# Altium PCB MolsonPCB.PcbDoc (part 3 of 9)
Units mil, origin at the board's own origin, x right, y up, seen from the top; angles counter-clockwise.
Board outline 8000 x 6000 mil, 14 copper layers (TopLayer (1 oz), InternalPlane1 (0.5 oz), InternalPlane2 (0.5 oz), MidLayer1 (0.5 oz), InternalPlane3 (0.5 oz), MidLayer2 (0.5 oz), InternalPlane4 (0.5 oz), InternalPlane5 (0.5 oz), MidLayer3 (0.5 oz), InternalPlane6 (0.5 oz), MidLayer4 (0.5 oz), InternalPlane7 (0.5 oz), InternalPlane8 (0.5 oz), BottomLayer (1 oz)), stack 86.2 mil thick; 657 components, 643 nets, 3094 pads, 1958 vias.
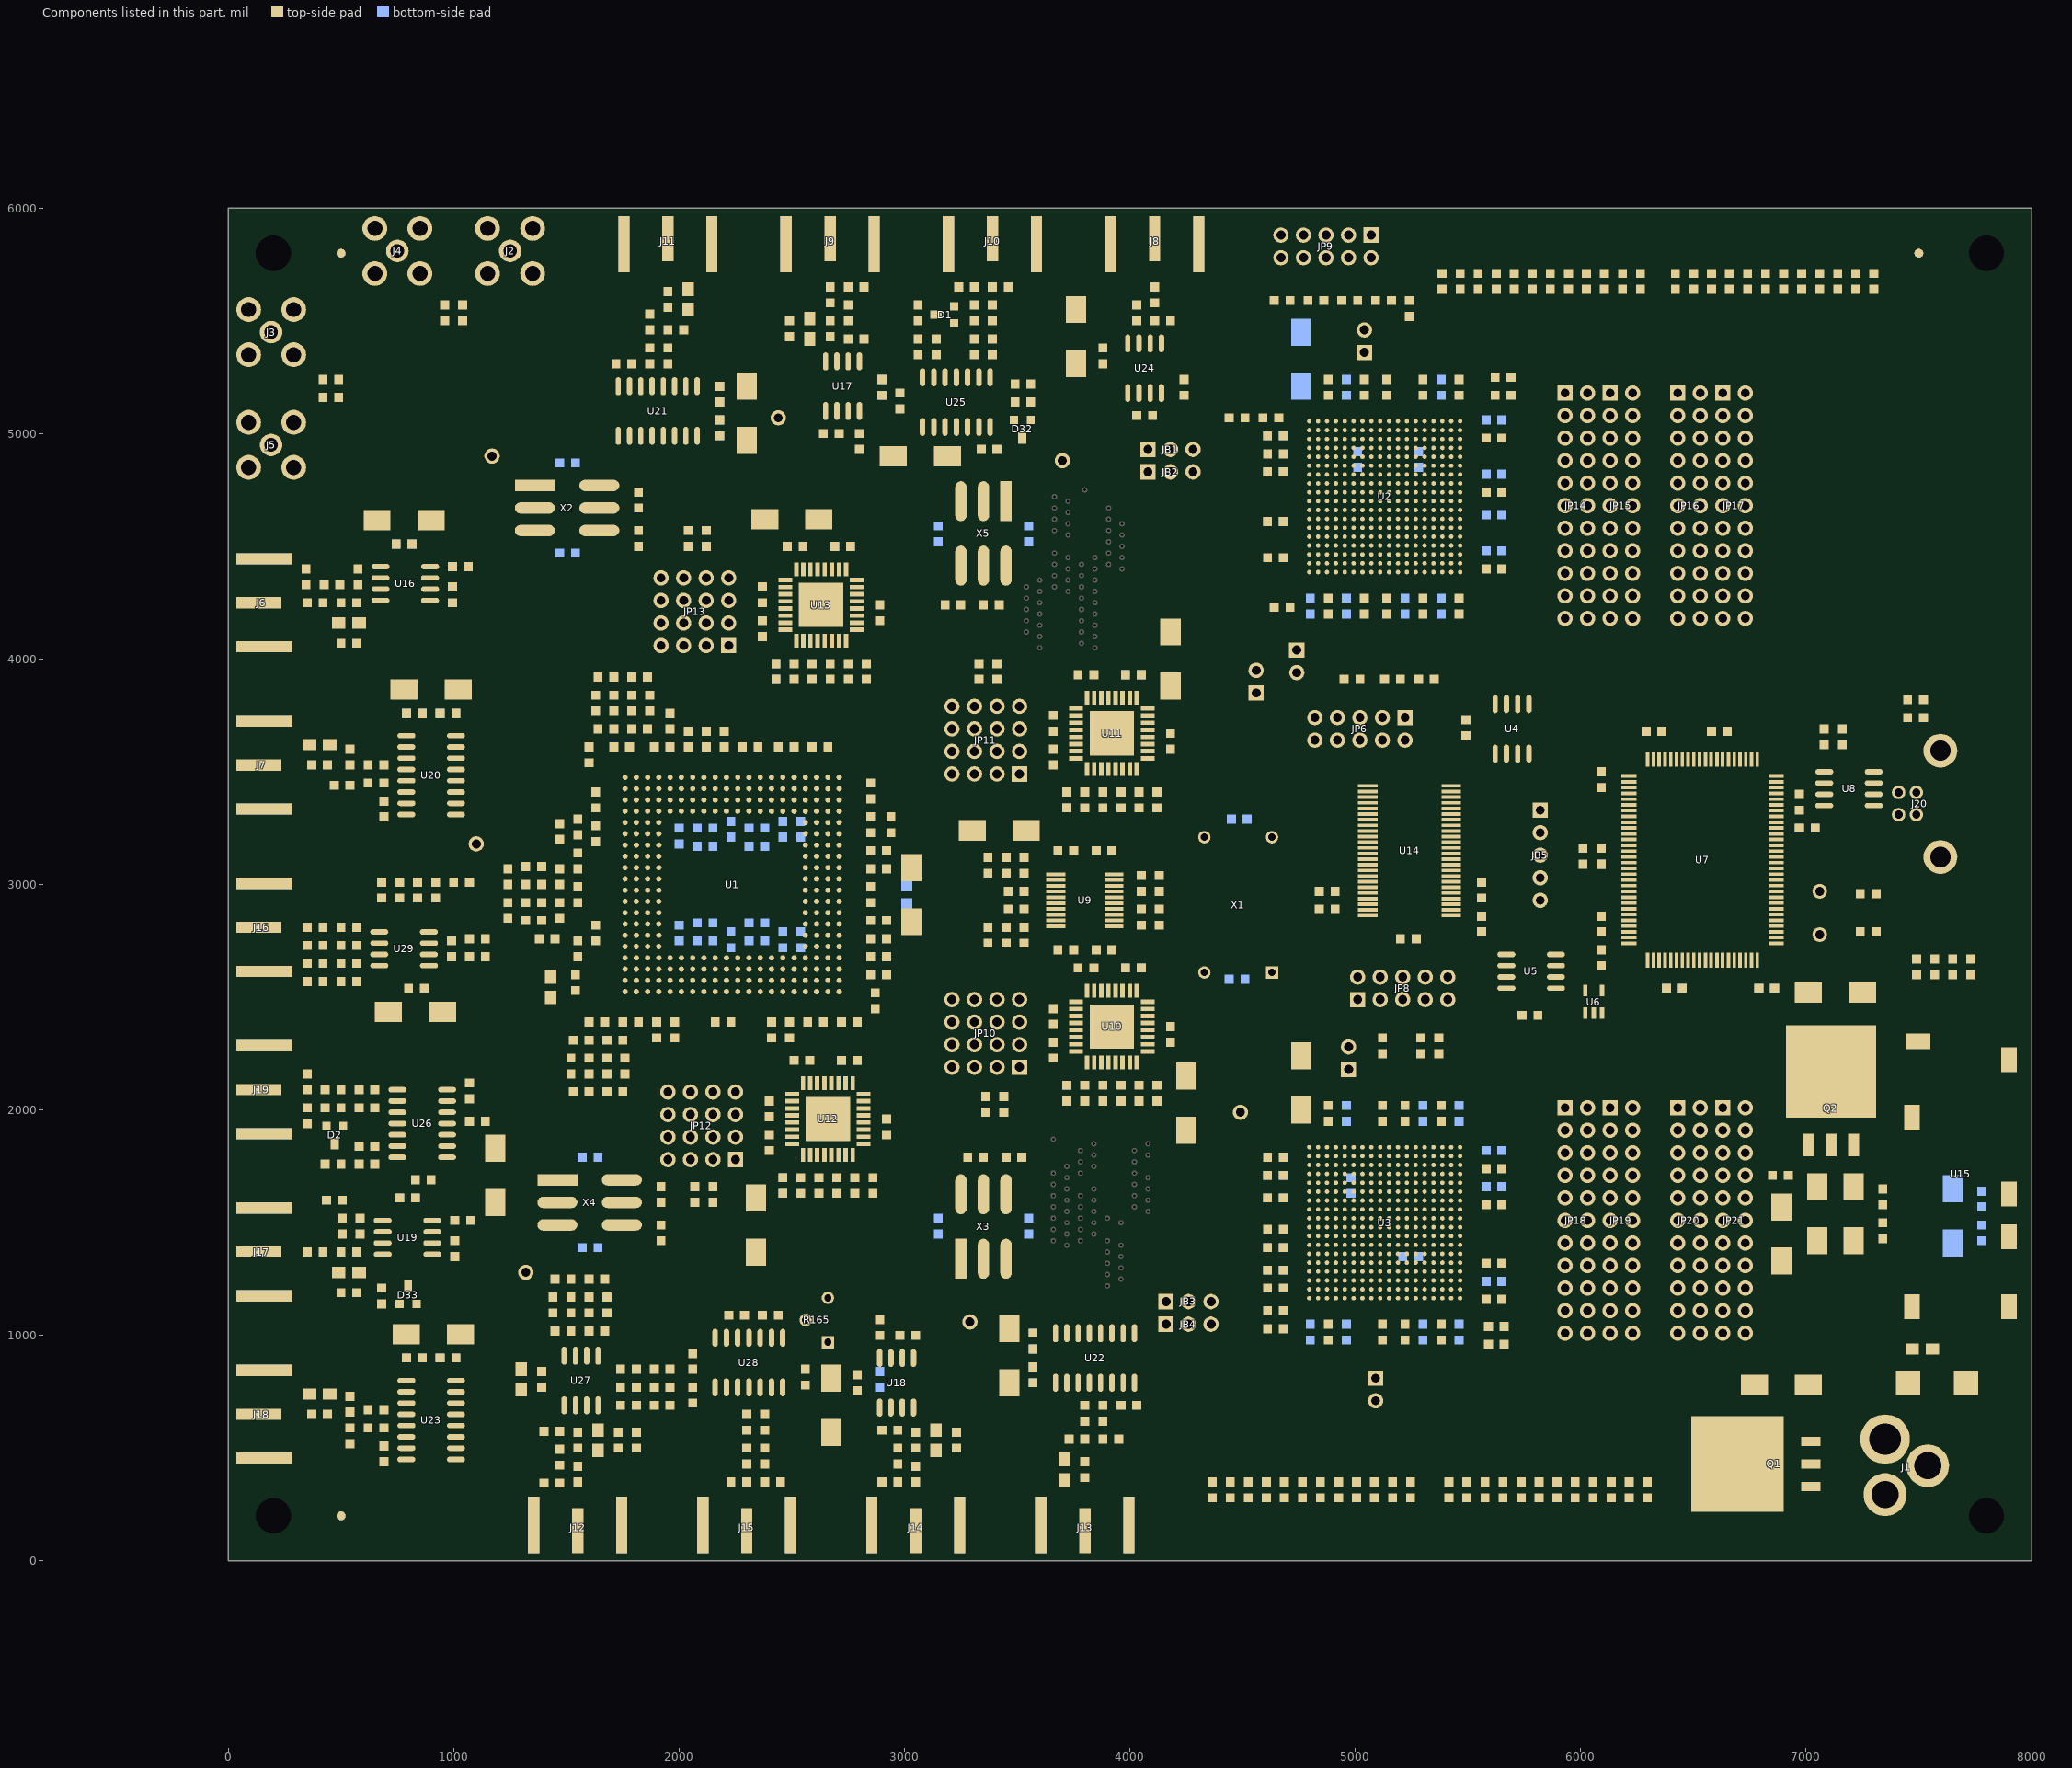
[diagram p15: the components of this part, seen from the top]

## Components (designator, comment, footprint, x,y, rotation, side; value= is the part's Value field where it differs from the comment) (continued)
C46 "0.1u" 0603 3720,2110 r270 top
C47 "0.1u" 0603 4120,2110 r270 top
C48 "0.1u" 0603 3960,3340 r90 top
C49 "0.1u" 0603 3800,3340 r90 top
C50 "0.1u" 0603 4050,3930 r180 top
C51 "0.1u" 0603 3720,3340 r90 top
C52 "0.1u" 0603 4120,3410 r270 top
C53 "0.1u" 0603 2700,1630 r90 top
C54 "0.1u" 0603 2540,1630 r90 top
C55 "0.1u" 0603 2460,1700 r270 top
C56 "0.1u" 0603 2860,1700 r270 top
C57 "0.1u" 0603 2790,2220 r180 top
C58 "0.1u" 0603 2670,3910 r90 top
C59 "0.1u" 0603 2510,3910 r90 top
C60 "0.1u" 0603 2830,3980 r270 top
C61 "0.1u" 0603 2430,3980 r270 top
C62 "0.1u" 0603 2760,4500 r180 top
C63 "100u" 7343 7580,790 r180 top
C64 "22u" 6032 7010,780 r180 top
C65 "0.1u" 0603 7340,1500 r270 top
C66 "22u" 6032 7050,1660 r270 top
C67 "2.2u" 0603 1040,5500 r90 top
C68 "2.2u" 0603 490,5240 r180 top
C69 "2.2u" 0603 420,4250 r180 top
C70 "2.2u" 0603 960,5500 r90 top
C71 "2.2u" 0603 490,5160 r180 top
C72 "2.2u" 0603 690,3530 r180 top
C73 "0.1u" 0603 745,4510 r0 top
C74 "2.2u" 0603 690,3450 r180 top
C75 "2.2u" 0603 4110,5580 r90 top
C76 "10n" 0603 3060,5500 r90 top
C77 "2.2u" 0603 1790,3840 r270 top
C78 "2.2u" 0603 2670,5580 r90 top
C79 "2.2u" 0603 1710,3840 r270 top
C80 "2.2u" 0603 3310,5500 r90 top
C81 "0.1u" 0603 3490,5220 r0 top
C82 "2.2u" 0603 1950,5310 r90 top
C83 "100p" 0603 3340,4930 r0 top
C84 "2.2u" 0603 3390,5500 r90 top
C85 "0.1u" 0603 2900,5240 r270 top
C86 "2.2u" 0603 1870,5310 r90 top
C87 "10n" 0603 3880,5310 r90 top
C88 "10n" 0603 1960,690 r180 top
C89 "10n" 0603 1810,500 r90 top
C90 "2.2u" 0603 1600,1170 r270 top
C91 "2.2u" 0603 1550,420 r270 top
C92 "2.2u" 0603 1520,1170 r270 top
C93 "2.2u" 0603 1470,345 r180 top
C94 "0.1u" 0603 1390,840 r270 top
C95 "1u" 0805 1300,850 r270 top
C96 "2.2u" 0603 3800,690 r270 top
C97 "2.2u" 0603 3050,420 r270 top
C98 "2.2u" 0603 3880,690 r270 top
C99 "0.1u" 0603 2060,920 r270 top
C100 "0.1u" 0603 2060,700 r90 top
C101 "0.1u" 0603 2790,755 r90 top
C102 "2.2u" 0603 1600,2230 r270 top
C103 "2.2u" 0603 2300,650 r270 top
C104 "2.2u" 0603 1680,2230 r270 top
C105 "2.2u" 0603 2380,650 r270 top
C106 "2.2u" 0603 500,2730 r0 top
C107 "0.1u" 0603 830,1690 r0 top
C108 "2.2u" 0603 500,2650 r0 top
C109 "2.2u" 0603 500,2570 r0 top
C110 "2.2u" 0603 1140,2760 r180 top
C111 "2.2u" 0603 500,2810 r0 top
C112 "2.2u" 0603 1140,2680 r180 top
C113 "10n" 0603 500,1760 r180 top
C114 "2.2u" 0603 420,1370 r180 top
C115 "2.2u" 0603 690,670 r180 top
C116 "2.2u" 0603 1320,2920 r0 top
C117 "2.2u" 0603 690,590 r180 top
C118 "10n" 0603 1070,3010 r180 top
C119 "2.2u" 0603 1320,3000 r0 top
C120 "0.1u" 0603 760,1610 r0 top
C121 "2.2u" 0603 500,2010 r180 top
C122 "0.1u" 0603 1070,1950 r0 top
C123 "100p" 0603 1070,2050 r90 top
C124 "2.2u" 0603 500,2090 r180 top
C125 "10n" 0603 800,2540 r0 top
C126 "0.1u" 0603 1010,3760 r180 top
C127 "0.1u" 0603 790,3760 r0 top
C128 "0.1u" 0603 2180,4990 r90 top
C129 "0.1u" 0603 2180,5210 r270 top
C130 "0.1u" 0603 3570,790 r90 top
C131 "0.1u" 0603 3570,1010 r270 top
C132 "0.1u" 0603 790,900 r0 top
C133 "0.1u" 0603 1010,900 r180 top
C134 "1u" 0603 690,3370 r270 top
C135 "1u" 0603 1790,5310 r180 top
C136 "1u" 0603 3960,690 r0 top
C137 "1u" 0603 690,510 r270 top
C138 "6.8u" 6032 3760,5310 r90 top
C139 "6.8u" 6032 950,2435 r180 top
C140 "0.1u" 0603 3680,3150 r0 top
C141 "0.1u" 0603 3680,2710 r0 top
C142 "10n" 0603 5200,2760 r0 top
C143 "0.1u" 0603 5220,4270 r270 bottom
C144 "0.1u" 0603 2980,5110 r90 top
C145 "10n" 0603 2560,780 r90 top
C146 "0.1u" 0603 5140,5170 r90 top
C147 "1n" 0603 5040,5170 r90 top
C148 "0.1u" 0603 5140,4270 r270 top
C149 "1n" 0603 5040,4270 r270 top
C150 "0.1u" 0603 5120,1050 r270 top
C151 "1n" 0603 5220,1050 r270 top
C152 "0.1u" 0603 5120,1950 r90 top
C153 "1n" 0603 5220,1950 r90 top
C154 "22u" 6032 6890,1570 r270 top
C155 "0.1u" 0603 4800,4270 r270 bottom
C156 "0.1u" 0603 5300,1050 r270 bottom
C157 "0.1u" 0603 4960,1050 r270 bottom
C158 "4.7n" 0603 7450,3820 r0 top
C159 "0.1u" 0603 2000,3250 r270 bottom
C160 "0.1u" 0603 2080,3250 r0 bottom
C161 "0.1u" 0603 2310,3250 r0 bottom
C162 "0.1u" 0603 2460,3280 r270 bottom
C163 "0.1u" 0603 2000,2750 r90 bottom
C164 "0.1u" 0603 2150,2750 r180 bottom
C165 "0.1u" 0603 2310,2750 r0 bottom
C166 "0.1u" 0603 2460,2720 r90 bottom
C167 "68u" 6032 3030,3075 r270 top
C168 "0.1u" 0603 6090,2790 r90 top
C169 "0.1u" 0603 6290,3680 r0 top
C170 "0.1u" 0603 4960,5170 r90 bottom
C171 "0.1u" 0603 5380,5170 r90 bottom
C172 "0.1u" 0603 4680,4990 r180 bottom
C173 "0.1u" 0603 5580,5060 r0 bottom
C174 "0.1u" 0603 4680,4610 r180 bottom
C175 "0.1u" 0603 5580,4640 r0 bottom
C176 "0.1u" 0603 4960,4270 r270 bottom
C177 "0.1u" 0603 5380,4270 r270 bottom
C178 "0.1u" 0603 4880,5170 r90 top
C179 "0.1u" 0603 5460,5170 r90 top
C180 "0.1u" 0603 4680,4830 r180 top
C181 "0.1u" 0603 5580,4740 r0 top
C182 "0.1u" 0603 4880,4270 r270 top
C183 "0.1u" 0603 5460,4270 r270 top
C184 "0.1u" 0603 4960,1950 r90 bottom
C185 "0.1u" 0603 5460,1950 r90 bottom
C186 "0.1u" 0603 4680,1610 r180 bottom
C187 "0.1u" 0603 5580,1820 r0 bottom
C188 "0.1u" 0603 4680,1290 r180 bottom
C189 "0.1u" 0603 5580,1240 r0 bottom
C190 "0.1u" 0603 4800,1050 r270 bottom
C191 "0.1u" 0603 5460,1050 r270 bottom
C192 "0.1u" 0603 5380,1950 r90 top
C193 "0.1u" 0603 4680,1710 r180 top
C194 "0.1u" 0603 5580,1580 r0 top
C195 "0.1u" 0603 4680,1390 r180 top
C196 "0.1u" 0603 5580,1160 r0 top
C197 "0.1u" 0603 4880,1050 r270 top
C198 "1u" 0805 7470,940 r0 top (schematic designator C?)
C199 "2.2u" 0603 345,4330 r90 top
C200 "2.2u" 0603 2750,5650 r0 top
C201 "2.2u" 0603 2970,350 r180 top
C202 "2.2u" 0603 505,1600 r180 top
C203 "10u" 6032 660,4615 r0 top
C204 "10u" 6032 2950,4900 r0 top
C205 "10u" 6032 2675,810 r270 top
C206 "10u" 6032 1185,1590 r90 top
C207 "10u" 6032 780,3865 r0 top
C208 "10u" 6032 2300,5210 r270 top
C209 "10u" 6032 3465,790 r90 top
C210 "10u" 6032 790,1005 r0 top
C211 "0.1u" 0603 1600,3540 r90 top
C212 "0.1u" 0603 1960,3690 r90 top
C213 "0.1u" 0603 2590,3610 r0 top
C214 "0.1u" 0603 1470,3270 r270 top
C215 "0.1u" 0603 1450,2760 r180 top
C216 "0.1u" 0603 1540,2600 r270 top
C217 "0.1u" 0603 1900,2390 r270 top
C218 "0.1u" 0603 2870,2520 r270 top
C219 "0.1u" 0603 2540,3280 r270 bottom
C220 "0.1u" 0603 2310,3170 r0 bottom
C221 "0.1u" 0603 2230,3280 r270 bottom
C222 "0.1u" 0603 2080,3170 r0 bottom
C223 "0.1u" 0603 2540,2720 r90 bottom
C224 "0.1u" 0603 2310,2830 r0 bottom
C225 "0.1u" 0603 2230,2720 r90 bottom
C226 "0.1u" 0603 2150,2830 r180 bottom
C227 "1u" 0805 1430,2590 r270 top
C228 "1u" 0805 3010,3000 r270 bottom
C229 "0.1u" 0603 4050,2630 r180 bottom
C230 "0.1u" 0603 3770,2630 r0 top
C231 "0.1u" 0603 3720,2110 r270 bottom
C232 "0.1u" 0603 4050,3930 r180 bottom
C233 "0.1u" 0603 3770,3930 r0 top
C234 "0.1u" 0603 3720,3340 r90 bottom
C235 "0.1u" 0603 2790,2220 r180 bottom
C236 "0.1u" 0603 2510,2220 r0 top
C237 "0.1u" 0603 2460,1700 r270 bottom
C238 "0.1u" 0603 2760,4500 r180 bottom
C239 "0.1u" 0603 2480,4500 r0 top
C240 "0.1u" 0603 2430,3980 r270 bottom
C241 "10u" 6032 4250,2150 r270 top
C242 "10u" 6032 4180,3880 r90 top
C243 "10u" 6032 2340,1610 r270 top
C244 "10u" 6032 2380,4620 r0 top
C245 "10u" 6032 3540,3240 r180 top
C246 "0.1u" 0603 3920,3150 r180 top
C247 "0.1u" 0603 3920,2710 r180 top
C248 "0.1u" 0603 4450,3290 r0 bottom
C249 "0.1u" 0603 4440,2580 r0 bottom
C250 "10u" 6032 4760,5210 r90 bottom
C251 "10u" 6032 4760,2000 r90 top
C252 "0.1u" 0603 6650,3680 r180 bottom
C253 "0.1u" 0603 6290,3680 r0 bottom
C254 "0.1u" 0603 6090,3430 r90 bottom
C255 "0.1u" 0603 6970,3250 r0 bottom
C256 "0.1u" 0603 6090,3090 r90 bottom
C257 "0.1u" 0603 6090,2790 r90 bottom
C258 "0.1u" 0603 6860,2540 r180 bottom
C259 "0.1u" 0603 6380,2540 r0 bottom
C260 "10u" 6032 7010,2520 r0 top
C261 "0.1u" 0603 7340,1650 r270 top
C262 "68u" 6032 7210,1660 r270 top
C263 "0.1u" 0603 7780,1490 r270 bottom
C264 "0.1u" 0603 7780,1640 r270 bottom
C265 "68u" 6032 7650,1650 r270 bottom
C266 "0.1u" 0603 745,4510 r0 bottom
C267 "0.1u" 0603 2900,5240 r270 bottom
C268 "0.1u" 0603 2890,770 r90 bottom
C269 "0.1u" 0603 760,1610 r0 bottom
C270 "0.1u" 0603 1010,3760 r180 bottom
C271 "0.1u" 0603 790,3760 r0 bottom
C272 "0.1u" 0603 2180,4990 r90 bottom
C273 "0.1u" 0603 2180,5210 r270 bottom
C274 "0.1u" 0603 3570,790 r90 bottom
C275 "0.1u" 0603 3570,1010 r270 bottom
C276 "0.1u" 0603 790,900 r0 bottom
C277 "0.1u" 0603 1010,900 r180 bottom
C278 "0.1u" 0603 1540,4870 r180 bottom
C279 "0.1u" 0603 3550,1520 r270 bottom
C280 "0.1u" 0603 3150,4520 r90 bottom
C281 "0.1u" 0603 1640,1790 r180 bottom
C282 "0.1u" 0603 1540,4470 r180 bottom
C283 "0.1u" 0603 3150,1520 r270 bottom
C284 "0.1u" 0603 3550,4520 r90 bottom
C285 "0.1u" 0603 1640,1390 r180 bottom
D1 "MMBD914" SOT-23 3220,5490 r90 top
D2 "MMBD914" SOT-23 510,1930 r180 top
D3 "LED2" 0603D 6105,5710 r270 top
D4 "LED2" 0603D 6265,5710 r270 top
D5 "LED2" 0603D 5945,5710 r270 top
D6 "LED2" 0603D 5785,5710 r270 top
D7 "LED2" 0603D 5625,5710 r270 top
D8 "LED2" 0603D 5465,5710 r270 top
D9 "LED2" 0603D 7140,5710 r270 top
D10 "LED2" 0603D 7300,5710 r270 top
D11 "LED2" 0603D 6980,5710 r270 top
D12 "LED2" 0603D 6820,5710 r270 top
D13 "LED2" 0603D 6660,5710 r270 top
D14 "LED2" 0603D 6500,5710 r270 top
D15 "LED2" 0603D 5085,280 r90 top
D16 "LED2" 0603D 5245,280 r90 top
D17 "LED2" 0603D 4925,280 r90 top
D18 "LED2" 0603D 4765,280 r90 top
D19 "LED2" 0603D 4605,280 r90 top
D20 "LED2" 0603D 4445,280 r90 top
D21 "LED2" 0603D 6135,280 r90 top
D22 "LED2" 0603D 6295,280 r90 top
D23 "LED2" 0603D 5975,280 r90 top
D24 "LED2" 0603D 5815,280 r90 top
D25 "LED2" 0603D 5655,280 r90 top
D26 "LED2" 0603D 5495,280 r90 top
D27 "LED2" 0603D 7570,2670 r270 top
D28 "LED2" 0603D 7730,2670 r270 top
D30 "LED2" 0603D 5690,5170 r180 top
D31 "LED2" 0603D 5660,1040 r180 top
D32 "SDM40E20LS" SOT-23 3560,5060 r180 top
D33 "SDM40E20LS" SOT-23 760,1140 r0 top
FID1 "FIDUCIAL" FIDUCIAL#1 480,6070 r90 top
FID2 "FIDUCIAL" FIDUCIAL#2 7510,6190 r90 top
FID3 "FIDUCIAL" FIDUCIAL#3 -220,100 r90 top
FID4 "FIDUCIAL" FIDUCIAL#4 7500,5800 r90 bottom
FID5 "FIDUCIAL" FIDUCIAL#4 500,5800 r90 bottom
FID6 "FIDUCIAL" FIDUCIAL#4 500,200 r90 bottom
J1 "PWR JACK" RAPC712 7350,540 r0 top
J2 "SMA-TH-RA" SMA-TH-RA 1250,5810 r90 top locked
J3 "SMA-TH-RA" SMA-TH-RA 190,5450 r180 top locked
J4 "SMA-TH-RA" SMA-TH-RA 750,5810 r90 top locked
J5 "SMA-TH-RA" SMA-TH-RA 190,4950 r180 top locked
J6 "BNC JACK" BNC-EDGE 160,4250 r90 top locked
J7 "BNC JACK" BNC-EDGE 160,3530 r90 top locked
J8 "BNC JACK" BNC-EDGE 4110,5840 r0 top locked
J9 "BNC JACK" BNC-EDGE 2670,5840 r0 top locked
J10 "BNC JACK" BNC-EDGE 3390,5840 r0 top locked
J11 "BNC JACK" BNC-EDGE 1950,5840 r0 top locked
J12 "BNC JACK" BNC-EDGE 1550,160 r180 top locked
J13 "BNC JACK" BNC-EDGE 3800,160 r180 top locked
J14 "BNC JACK" BNC-EDGE 3050,160 r180 top locked
J15 "BNC JACK" BNC-EDGE 2300,160 r180 top locked
J16 "BNC JACK" BNC-EDGE 160,2810 r90 top locked
J17 "BNC JACK" BNC-EDGE 160,1370 r90 top locked
J18 "BNC JACK" BNC-EDGE 160,650 r90 top locked
J19 "BNC JACK" BNC-EDGE 160,2090 r90 top locked
J20 "USB-B" USB-B 7410,3310 r90 top
JB1 "3PIN" 3X1PIN 4080,4930 r90 top
JB2 "3PIN" 3X1PIN 4080,4830 r90 top
JB3 "3PIN" 3X1PIN 4160,1150 r90 top
JB4 "3PIN" 3X1PIN 4160,1050 r90 top
JB5 "5 PINFL" "5X1 PINFL" 5820,3330 r0 top
JP1 "HEADER 1X2" 1X2PIN 4740,4040 r270 top
JP2 "HEADER 1X2" 1X2PIN 5040,5360 r90 top
JP3 "HEADER 1X2" 1X2PIN 5090,810 r270 top
JP4 "HEADER 1X2" 1X2PIN 4970,2180 r90 top
JP6 "HEADER 5X2" 2X5PIN 5220,3740 r270 top
JP8 "HEADER 5X2" 2X5PIN 5010,2490 r90 top
JP9 "HEADER 5X2" 2X5PIN 5070,5880 r270 top
JP10 "" "4X4 PIN" 3510,2190 r180 top
JP11 "" "4X4 PIN" 3510,3490 r180 top
JP12 "" "4X4 PIN" 2250,1780 r180 top
JP13 "" "4X4 PIN" 2220,4060 r180 top
JP14 "HEADER 11X2" 2X11PIN 5930,5180 r0 top
JP15 "HEADER 11X2" 2X11PIN 6130,5180 r0 top
JP16 "HEADER 11X2" 2X11PIN 6430,5180 r0 top
JP17 "HEADER 11X2" 2X11PIN 6630,5180 r0 top
JP18 "HEADER 11X2" 2X11PIN 5930,2010 r0 top
JP19 "HEADER 11X2" 2X11PIN 6130,2010 r0 top
JP20 "HEADER 11X2" 2X11PIN 6430,2010 r0 top
JP21 "HEADER 11X2" 2X11PIN 6630,2010 r0 top
JP26 "HEADER 1X2" 1X2PIN 4560,3850 r90 top
L1 "5.6nH" 0805 580,4160 r180 top
L2 "5.6nH" 0805 2580,5420 r90 top
L3 "5.6nH" 0805 3140,580 r270 top
L4 "5.6nH" 0805 580,1280 r180 top
L5 "10nH" 0805 450,3620 r180 top
L6 "10nH" 0805 2040,5550 r90 top
L7 "10nH" 0805 3710,450 r270 top
L8 "10nH" 0805 450,740 r180 top
L9 "8.2nH" 0805 1640,580 r270 top
L10 "Ferrite Bead" 0603 6920,1710 r180 top
Q1 "LM2940CS-5.0" SIP-G3/Y2.1 7020,430 r90 top
Q2 "LT1587CM-1.5" DDPACK3 7110,1845 r0 top
R1 "0" 0603 4510,5070 r180 top
R2 "0" 0603 4660,5070 r180 top
R3 "10K" 0603 5280,3910 r0 top
R4 "10K" 0603 5240,5520 r90 top
R5 "10K" 0603 5020,3910 r180 top
R6 "10K" 0603 5130,3910 r0 top
R7 "0" 0603 4680,1210 r180 top
R8 "0" 0603 4680,1110 r180 top
R9 "10K" 0603 5120,2320 r270 top
R10 "10K" 0603 4680,1030 r180 top
R11 "10K" 0603 5370,2320 r270 top
R12 "10K" 0603 5290,2320 r270 top
R13 "1.0K" 0603 4940,5590 r0 top
R14 "1.0K" 0603 4710,5590 r180 top
R15 "1.0K" 0603 5160,5590 r180 top
R16 "4.7K" 0603 6090,2710 r270 top
R17 "2.2K" 0603 7160,3620 r90 top
R18 "2.2K" 0603 7080,3620 r90 top
R19 "0" 0603 4910,2890 r180 top
R20 "0" 0603 5560,2790 r90 top
R21 "0" 0603 4910,2970 r180 top
R22 "0" 0603 5560,3010 r270 top
R23 "2.0K" 0603 4040,2110 r270 top
R24 "2.0K" 0603 3880,2110 r270 top
R25 "2.0K" 0603 4040,3410 r270 top
R26 "2.0K" 0603 3880,3410 r270 top
R27 "2.0K" 0603 2780,1700 r270 top
R28 "2.0K" 0603 2620,1700 r270 top
R29 "2.0K" 0603 2750,3980 r270 top
R30 "2.0K" 0603 2590,3980 r270 top
R31 "100" 0603 4180,2300 r90 top
R32 "100" 0603 2850,2920 r90 top
R33 "100" 0603 2850,3450 r270 top
R34 "100" 0603 4180,3600 r90 top
R35 "100" 0603 2920,1890 r90 top
R36 "100" 0603 2230,2390 r180 top
R37 "100" 0603 2280,3610 r0 top
R38 "100" 0603 2890,4240 r270 top
R39 "147" 0603 3370,2740 r90 top
R40 "147" 0603 3450,2740 r90 top
R41 "147" 0603 3450,3120 r270 top
R42 "147" 0603 3370,3120 r270 top
R43 "82" 0603 4130,2820 r90 top
R44 "82" 0603 4130,3040 r270 top
R45 "147" 0603 3460,2890 r0 top
R46 "147" 0603 3530,2740 r90 top
R47 "147" 0603 3530,3120 r270 top
R48 "147" 0603 3460,2970 r0 top
R49 "121" 0603 3660,2230 r90 top
R50 "121" 0603 3660,2450 r270 top
R51 "121" 0603 3660,3530 r90 top
R52 "121" 0603 3660,3750 r270 top
R53 "121" 0603 2400,1820 r90 top
R54 "121" 0603 2400,2040 r270 top
R55 "121" 0603 2370,4100 r90 top
R56 "121" 0603 2370,4320 r270 top
R57 "0" 0603 1070,2760 r0 top
R58 "0" 0603 1070,2680 r0 top
R59 "0" 0603 570,1370 r180 top
R60 "2.0K" 0603 1960,850 r180 top
R61 "100" 0603 1550,3220 r90 top
R62 "100" 0603 995,4320 r270 top
R63 "100" 0603 1550,3140 r270 top
R64 "100" 0603 4030,5080 r0 top
R65 "100" 0603 1780,3610 r180 top
R66 "100" 0603 3310,5420 r270 top
R67 "100" 0603 2710,5000 r180 top
R68 "100" 0603 1630,3410 r270 top
R69 "100" 0603 3390,5420 r270 top
R70 "100" 0603 1820,2390 r180 top
R71 "100" 0603 2980,1000 r0 top
R72 "100" 0603 1600,2390 r0 top
R73 "100" 0603 990,2750 r270 top
R74 "100" 0603 1550,2750 r270 top
R75 "100" 0603 1550,2920 r90 top
R76 "100" 0603 1005,1420 r270 top
R77 "100" 0603 580,2010 r0 top
R78 "100" 0603 580,2090 r0 top
R79 "75" 0603 570,4070 r180 top
R80 "75" 0603 575,4330 r90 top
R81 "75" 0603 570,4250 r180 top
R82 "75" 0603 440,3530 r180 top
R83 "75" 0603 540,3600 r270 top
R84 "75" 0603 4110,5500 r0 top
R85 "75" 0603 3060,5350 r90 top
R86 "75" 0603 3140,5350 r90 top
R87 "75" 0603 2490,5430 r90 top
R88 "75" 0603 2750,5420 r0 top
R89 "75" 0603 2670,5430 r90 top
R90 "75" 0603 1950,5560 r90 top
R91 "75" 0603 3460,5650 r180 top
R92 "75" 0603 2020,5460 r180 top
R93 "75" 0603 1730,570 r270 top
R94 "75" 0603 1550,570 r270 top
R95 "75" 0603 3230,570 r270 top
R96 "75" 0603 2970,580 r180 top
R97 "75" 0603 3800,440 r270 top
R98 "75" 0603 3050,570 r270 top
R99 "75" 0603 2290,1090 r180 top
R100 "75" 0603 2370,1090 r0 top
R101 "75" 0603 3730,540 r0 top
R102 "75" 0603 2300,500 r270 top
R103 "75" 0603 2230,350 r0 top
R104 "75" 0603 2380,500 r270 top
R105 "75" 0603 350,2810 r0 top
R106 "75" 0603 650,1760 r180 top
R107 "75" 0603 650,1840 r180 top
R108 "75" 0603 570,1190 r180 top
R109 "75" 0603 585,1450 r90 top
R110 "75" 0603 440,650 r180 top
R111 "75" 0603 540,730 r270 top
R112 "75" 0603 350,2160 r270 top
R113 "750" 0603 995,4410 r0 top
R114 "750" 0603 2800,5000 r270 top
R115 "750" 0603 2890,1000 r90 top
R116 "750" 0603 1005,1510 r0 top
R117 "750" 0603 920,3010 r270 top
R118 "150" 0603 425,4330 r0 top
R119 "150" 0603 2750,5570 r270 top
R120 "150" 0603 1470,495 r270 top
R121 "150" 0603 2970,430 r90 top
R122 "150" 0603 350,2730 r0 top
R123 "150" 0603 350,2650 r0 top
R124 "150" 0603 350,2570 r0 top
R125 "150" 0603 505,1520 r270 top
R126 "90.9" 0603 1790,3920 r0 top
R127 "90.9" 0603 1640,3920 r0 top
R128 "90.9" 0603 1240,2920 r270 top
R129 "90.9" 0603 1240,3070 r270 top
R130 "37.4" 0603 470,3440 r0 top
R131 "37.4" 0603 4030,5500 r90 top
R132 "37.4" 0603 3240,5650 r0 top
R133 "37.4" 0603 1870,5530 r270 top
R134 "37.4" 0603 3950,540 r180 top
R135 "37.4" 0603 2380,350 r0 top
R136 "37.4" 0603 540,520 r90 top
R137 "37.4" 0603 350,1940 r90 top
R138 "218.2" 0603 1870,3770 r90 top
R139 "218.2" 0603 1630,3840 r270 top
R140 "218.2" 0603 1390,2840 r180 top
R141 "218.2" 0603 1320,3080 r0 top
R142 "223.8" 0603 1860,3690 r180 top
R143 "223.8" 0603 1710,3690 r180 top
R144 "223.8" 0603 1470,2850 r90 top
R145 "223.8" 0603 1470,3000 r90 top
R146 "1.91K" 0603 4240,5240 r270 top
R147 "52.3" 0603 1600,1020 r0 top
R148 "52.3" 0603 1520,1020 r180 top
R149 "52.3" 0603 1600,2080 r180 top
R150 "52.3" 0603 1680,2080 r0 top
R151 "40.3" 0603 1680,1100 r90 top
R152 "40.3" 0603 1440,1170 r270 top
R153 "40.3" 0603 1520,2160 r90 top
R154 "40.3" 0603 1760,2230 r270 top
R155 "680" 0603 1890,770 r0 top
R156 "108.7" 0603 1670,1250 r180 top
R157 "108.7" 0603 1450,1250 r0 top
R158 "108.7" 0603 1530,2310 r0 top
R159 "108.7" 0603 1750,2310 r180 top
R160 "51.1" 0603 1740,770 r0 top
R161 "51.1" 0603 1740,850 r0 top
R162 "51.1" 0603 840,3010 r270 top
R163 "51.1" 0603 760,3010 r270 top
R164 "59" 0603 1740,690 r0 top
R165 "100K" POT6MM 2660,970 r180 top
R166 "1540" 0603 680,2940 r90 top
R167 "1M" 0603 7450,3740 r0 top
R168 "220" 0603 6025,5640 r90 top
R169 "220" 0603 6185,5640 r90 top
R170 "220" 0603 5865,5640 r90 top
R171 "220" 0603 5705,5640 r90 top
R172 "220" 0603 5545,5640 r90 top
R173 "220" 0603 5385,5640 r90 top
R174 "220" 0603 7060,5640 r90 top
R175 "220" 0603 7220,5640 r90 top
R176 "220" 0603 6900,5640 r90 top
R177 "220" 0603 6740,5640 r90 top
R178 "220" 0603 6580,5640 r90 top
R179 "220" 0603 6420,5640 r90 top
R180 "220" 0603 5005,350 r270 top
R181 "220" 0603 5165,350 r270 top
R182 "220" 0603 4845,350 r270 top
R183 "220" 0603 4685,350 r270 top
R184 "220" 0603 4525,350 r270 top
R185 "220" 0603 4365,350 r270 top
R186 "220" 0603 6055,350 r270 top
R187 "220" 0603 6215,350 r270 top
R188 "220" 0603 5895,350 r270 top
R189 "220" 0603 5735,350 r270 top
R190 "220" 0603 5575,350 r270 top
R191 "220" 0603 5415,350 r270 top
R192 "0" 0603 4790,5590 r0 top
R193 "220" 0603 7650,2600 r90 top
R194 "360" 0603 7490,2600 r90 top
R195 "1k" 0603 6970,3330 r90 top
R196 "220" 0603 5620,5250 r0 top
R197 "220" 0603 5590,960 r0 top
R198 "130" 0603 4050,2890 r270 top
R199 "130" 0603 4050,2970 r90 top
R200 "1K" 0603 6010,3160 r270 top
R201 "10" 0603 2850,3300 r270 top
R202 "10" 0603 2040,3680 r270 top
R203 "10" 0603 2410,2320 r90 top
R204 "10" 0603 2920,2840 r180 top
R205 "22" 0603 2850,3070 r0 top
R206 "22" 0603 2850,3150 r0 top
R207 "22" 0603 2120,3610 r90 top
R208 "22" 0603 2200,3610 r90 top
R209 "22" 0603 2570,2390 r0 top
R210 "22" 0603 2720,2390 r0 top
R211 "22" 0603 2850,2680 r0 top
R212 "22" 0603 2850,2600 r0 top
R213 "0" 0603 4640,4230 r0 top
R214 "0" 0603 4610,4910 r0 top
R215 "0" 0603 4610,1470 r0 top
R216 "0" 0603 4610,1790 r0 top
R217 "82" 0603 3490,5140 r0 top
R218 "82" 0603 680,1210 r270 top
R219 "75" 0603 1470,575 r180 top
R220 "130" 0603 1820,4670 r90 top
R221 "130" 0603 1820,4570 r270 top
R222 "0" 0603 2040,4570 r270 top
R223 "0" 0603 2120,4570 r270 top
R224 "130" 0603 3350,1790 r180 top
R225 "130" 0603 3450,1790 r0 top
R226 "0" 0603 3440,1990 r90 top
R227 "0" 0603 3360,1990 r90 top
R228 "130" 0603 1920,1590 r90 top
R229 "130" 0603 1920,1490 r270 top
R230 "0" 0603 2150,1590 r90 top
R231 "0" 0603 2070,1590 r90 top
R232 "130" 0603 3350,4240 r0 top
R233 "130" 0603 3250,4240 r180 top
R234 "0" 0603 3330,3980 r270 top
R235 "0" 0603 3410,3980 r270 top
TP1 "1PIN" 1PIN 1170,4900 r90 top
TP2 "1PIN" 1PIN 2440,5070 r90 top
TP3 "1PIN" 1PIN 3700,4880 r90 top
TP4 "1PIN" 1PIN 1100,3180 r90 top
TP5 "1PIN" 1PIN 4490,1990 r90 top
TP6 "1PIN" 1PIN 1320,1280 r90 top
TP7 "1PIN" 1PIN 3290,1060 r90 top
U1 "CYV15G0403DXB" BGA27X27-B256 2235,3000 r90 top locked
U2 "EP1C12F324C8" BGA19X19-B324 5130,4720 r90 top locked
U3 "EP1C12F324C8" BGA19X19-B324 5130,1500 r270 top locked
U4 "EPCS4SI8" SO-8 5620,3580 r90 top
U5 "EPCS4SI8" SO-8 5890,2540 r180 top
U6 "TPS3820-33" DBV 6020,2430 r90 top
U7 "CY7C68013-100AC" R-QFP14X20-G100/P.65N 6540,3110 r180 top locked
U8 "24LC00" SO-8 7300,3350 r180 top
U9 "CY2DP314OI" SSO-G20/P.65 3800,2930 r90 top locked
U10 "SY87729L" QFP7X7-G32/N 3920,2370 r180 top locked
U11 "SY87729L" QFP7X7-G32/N 3920,3670 r180 top locked
U12 "SY87729L" QFP7X7-G32/N 2660,1960 r180 top locked
U13 "SY87729L" QFP7X7-G32/N 2630,4240 r180 top locked
U14 "CY8C27643-24PVI" SSO-G48 5240,3150 r90 top
U15 "APC08F08" APC08F08 7469.8,1128.23 r90 top
U16 "GS1528" SO-8 895,4260 r180 top
U17 "GS1528" SO-8 2650,5100 r90 top
U18 "GS1528" SO-8 3040,900 r270 top
U19 "GS1528" SO-8 905,1360 r180 top
U20 "GS1524" SO-16 790,3660 r0 top
U21 "GS1524" SO-16 2080,5210 r270 top
U22 "GS1524" SO-16 3670,790 r90 top
U23 "GS1524" SO-16 790,800 r0 top
U24 "CLC001" SO-8 3990,5180 r90 top
U25 "CLC014" SO-14 3080,5030 r90 top
U26 "CLC014" SO-14 970,1790 r180 top
U27 "GS9028" SO-8 1490,690 r90 top
U28 "GS9024" SO-14 2160,770 r90 top
U29 "CLC007" SO-8 670,2790 r0 top
X1 "27 MHz" DIP14OSC 4630,2610 r180 top locked
X2 "74.25 MHz" OSC14X9 1330,4770 r0 top
X3 "74.25 MHz" OSC14X9 3250,1310 r90 top
X4 "74.25 MHz" OSC14X9 1430,1690 r0 top
X5 "74.25 MHz" OSC14X9 3450,4730 r270 top
Y1 "24 MHz" HC-49 7060,2970 r270 top

## Footprints (in the part's own frame and the unit in brackets; to place one, negate y for a bottom-side part, rotate by r counter-clockwise, add the part's x,y. Pads: shape width x height; smd on the part's side, far side on the other; paste and mask are expansions set on the pad)
1PIN [mil] "Testpoint"
  round 68 hole 40: 1(0,0)
  silkscreen extent -50,-50 50,50
1X2PIN [mil]
  rect 68x68 hole 40: 1(0,0)
  round 68 hole 40: 2(100,0)
  silkscreen extent -50,-50 150,50
2X5PIN [mil]
  rect 68x68 hole 40: 1(-0.31,0.06)
  round 68 hole 40: 2(99.69,0.06) 3(-0.31,-99.94) 4(99.69,-99.94) 5(-0.31,-199.94) 6(99.69,-199.94) 7(-0.31,-299.94) 8(99.69,-299.94) 9(-0.31,-399.94) 10(99.69,-399.94)
  silkscreen extent -70,-540 170,140
2X11PIN [mil]
  rect 68x68 hole 40: 1(0,0)
  round 68 hole 40: 2(100,0) 3(0,-100) 4(100,-100) 5(0,-200) 6(100,-200) 7(0,-300) 8(100,-300) 9(0,-400) 10(100,-400) 11(0,-500) 12(100,-500) 13(0,-600) 14(100,-600) 15(0,-700) 16(100,-700) 17(0,-800) 18(100,-800) 19(0,-900) 20(100,-900) 21(0,-1000) 22(100,-1000)
  silkscreen extent -50,-1050 150,50
3X1PIN [mil]
  rect 68x68 hole 40: 1(0,0)
  round 68 hole 40: 2(0,-100) 3(0,-200)
  silkscreen extent -50,-250 50,50
"4X4 PIN" [mil]
  rect 68x68 hole 40: 1(0,0)
  round 68 hole 40: 2(100,0) 3(200,0) 4(300,0) 5(0,-100) 6(100,-100) 7(200,-100) 8(300,-100) 9(0,-200) 10(100,-200) 11(200,-200) 12(300,-200) 13(0,-300) 14(100,-300) 15(200,-300) 16(300,-300)
  silkscreen extent -50,-350 350,50
"5X1 PINFL" [mil] "5x1 Pin Friction Lock"
  rect 68x68 hole 40: 1(0,0)
  round 68 hole 40: 2(0,-100) 3(0,-200) 4(0,-300) 5(0,-400)
  silkscreen extent -100,-450 125,50
0603 [mil]
  rect 40x40 smd: 1(0,0) 2(70,0)
  silkscreen extent -40,-40 110,40
0603D [mil]
  rect 40x40 smd: 1(0,0) 2(70,0)
  silkscreen extent -40,-40 115,40
0805 [mil]
  rect 60x50 smd: 1(0,0) 2(90,0)
  silkscreen extent -50,-45 140,45
6032 [mil]
  rect 120x90 smd: 1(0,0) 2(240,0)
  silkscreen extent -85,-65 320,65
7343 [mm]
  rect 2.75x2.7 smd: 1(3.275,0) 2(-3.275,0)
  silkscreen extent -5.21,-2.16 5.33,2.16
APC08F08 [mil]
  rect 110x70 smd: P1(0,0) P2(499.61,-429.92) P3(309.84,-429.92) P4(0,-429.92) P6(1094.49,-429.92) P7(839.76,0)
  rect 70x110 smd: P5(1176.77,-25.2)
  silkscreen extent -75,-485 1235,55
BGA19X19-B324 [mm]
  round 0.5 smd: A1(-8.5,8.5) A2(-7.5,8.5) A3(-6.5,8.5) A4(-5.5,8.5) A5(-4.5,8.5) A6(-3.5,8.5) A7(-2.5,8.5) A8(-1.5,8.5) A9(-0.5,8.5) A10(0.5,8.5) A11(1.5,8.5) A12(2.5,8.5) A13(3.5,8.5) A14(4.5,8.5) A15(5.5,8.5) A16(6.5,8.5) A17(7.5,8.5) A18(8.5,8.5) B1(-8.5,7.5) B2(-7.5,7.5) B3(-6.5,7.5) B4(-5.5,7.5) B5(-4.5,7.5) B6(-3.5,7.5) B7(-2.5,7.5) B8(-1.5,7.5) B9(-0.5,7.5) B10(0.5,7.5) B11(1.5,7.5) B12(2.5,7.5) B13(3.5,7.5) B14(4.5,7.5) B15(5.5,7.5) B16(6.5,7.5) B17(7.5,7.5) B18(8.5,7.5) C1(-8.5,6.5) C2(-7.5,6.5) C3(-6.5,6.5) C4(-5.5,6.5) C5(-4.5,6.5) C6(-3.5,6.5) C7(-2.5,6.5) C8(-1.5,6.5) C9(-0.5,6.5) C10(0.5,6.5) C11(1.5,6.5) C12(2.5,6.5) C13(3.5,6.5) C14(4.5,6.5) C15(5.5,6.5) C16(6.5,6.5) C17(7.5,6.5) C18(8.5,6.5) D1(-8.5,5.5) D2(-7.5,5.5) D3(-6.5,5.5) D4(-5.5,5.5) D5(-4.5,5.5) D6(-3.5,5.5) D7(-2.5,5.5) D8(-1.5,5.5) D9(-0.5,5.5) D10(0.5,5.5) D11(1.5,5.5) D12(2.5,5.5) D13(3.5,5.5) D14(4.5,5.5) D15(5.5,5.5) D16(6.5,5.5) D17(7.5,5.5) D18(8.5,5.5) E1(-8.5,4.5) E2(-7.5,4.5) E3(-6.5,4.5) E4(-5.5,4.5) E5(-4.5,4.5) E6(-3.5,4.5) E7(-2.5,4.5) E8(-1.5,4.5) E9(-0.5,4.5) E10(0.5,4.5) E11(1.5,4.5) E12(2.5,4.5) E13(3.5,4.5) E14(4.5,4.5) E15(5.5,4.5) E16(6.5,4.5) E17(7.5,4.5) E18(8.5,4.5) F1(-8.5,3.5) F2(-7.5,3.5) F3(-6.5,3.5) F4(-5.5,3.5) F5(-4.5,3.5) F6(-3.5,3.5) F7(-2.5,3.5) F8(-1.5,3.5) F9(-0.5,3.5) F10(0.5,3.5) F11(1.5,3.5) F12(2.5,3.5) F13(3.5,3.5) F14(4.5,3.5) F15(5.5,3.5) F16(6.5,3.5) F17(7.5,3.5) F18(8.5,3.5) G1(-8.5,2.5) G2(-7.5,2.5) G3(-6.5,2.5) G4(-5.5,2.5) G5(-4.5,2.5) G6(-3.5,2.5) G7(-2.5,2.5) G8(-1.5,2.5) G9(-0.5,2.5) G10(0.5,2.5) G11(1.5,2.5) G12(2.5,2.5) G13(3.5,2.5) G14(4.5,2.5) G15(5.5,2.5) G16(6.5,2.5) G17(7.5,2.5) G18(8.5,2.5) H1(-8.5,1.5) H2(-7.5,1.5) H3(-6.5,1.5) H4(-5.5,1.5) H5(-4.5,1.5) H6(-3.5,1.5) H7(-2.5,1.5) H8(-1.5,1.5) H9(-0.5,1.5) H10(0.5,1.5) H11(1.5,1.5) H12(2.5,1.5) H13(3.5,1.5) H14(4.5,1.5) H15(5.5,1.5) H16(6.5,1.5) H17(7.5,1.5) H18(8.5,1.5) J1(-8.5,0.5) J2(-7.5,0.5) J3(-6.5,0.5) J4(-5.5,0.5) J5(-4.5,0.5) J6(-3.5,0.5) J7(-2.5,0.5) J8(-1.5,0.5) J9(-0.5,0.5) J10(0.5,0.5) J11(1.5,0.5) J12(2.5,0.5) J13(3.5,0.5) J14(4.5,0.5) J15(5.5,0.5) J16(6.5,0.5) J17(7.5,0.5) J18(8.5,0.5) K1(-8.5,-0.5) K2(-7.5,-0.5) K3(-6.5,-0.5) K4(-5.5,-0.5) K5(-4.5,-0.5) K6(-3.5,-0.5) K7(-2.5,-0.5) K8(-1.5,-0.5) K9(-0.5,-0.5) K10(0.5,-0.5) K11(1.5,-0.5) K12(2.5,-0.5) K13(3.5,-0.5) K14(4.5,-0.5) K15(5.5,-0.5) K16(6.5,-0.5) K17(7.5,-0.5) K18(8.5,-0.5) L1(-8.5,-1.5) L2(-7.5,-1.5) L3(-6.5,-1.5) L4(-5.5,-1.5) L5(-4.5,-1.5) L6(-3.5,-1.5) L7(-2.5,-1.5) L8(-1.5,-1.5) L9(-0.5,-1.5) L10(0.5,-1.5) L11(1.5,-1.5) L12(2.5,-1.5) L13(3.5,-1.5) L14(4.5,-1.5) L15(5.5,-1.5) L16(6.5,-1.5) L17(7.5,-1.5) L18(8.5,-1.5) M1(-8.5,-2.5) M2(-7.5,-2.5) M3(-6.5,-2.5) M4(-5.5,-2.5) M5(-4.5,-2.5) M6(-3.5,-2.5) M7(-2.5,-2.5) M8(-1.5,-2.5) M9(-0.5,-2.5) M10(0.5,-2.5) M11(1.5,-2.5) M12(2.5,-2.5) M13(3.5,-2.5) M14(4.5,-2.5) M15(5.5,-2.5) M16(6.5,-2.5) M17(7.5,-2.5) M18(8.5,-2.5) N1(-8.5,-3.5) N2(-7.5,-3.5) N3(-6.5,-3.5) N4(-5.5,-3.5) N5(-4.5,-3.5) N6(-3.5,-3.5) N7(-2.5,-3.5) N8(-1.5,-3.5) N9(-0.5,-3.5) N10(0.5,-3.5) N11(1.5,-3.5) N12(2.5,-3.5) N13(3.5,-3.5) N14(4.5,-3.5) N15(5.5,-3.5) N16(6.5,-3.5) N17(7.5,-3.5) N18(8.5,-3.5) P1(-8.5,-4.5) P2(-7.5,-4.5) P3(-6.5,-4.5) P4(-5.5,-4.5) P5(-4.5,-4.5) P6(-3.5,-4.5) P7(-2.5,-4.5) P8(-1.5,-4.5) P9(-0.5,-4.5) P10(0.5,-4.5) P11(1.5,-4.5) P12(2.5,-4.5) P13(3.5,-4.5) P14(4.5,-4.5) P15(5.5,-4.5) P16(6.5,-4.5) P17(7.5,-4.5) P18(8.5,-4.5) R1(-8.5,-5.5) R2(-7.5,-5.5) R3(-6.5,-5.5) R4(-5.5,-5.5) R5(-4.5,-5.5) R6(-3.5,-5.5) R7(-2.5,-5.5) R8(-1.5,-5.5) R9(-0.5,-5.5) R10(0.5,-5.5) R11(1.5,-5.5) R12(2.5,-5.5) R13(3.5,-5.5) R14(4.5,-5.5) R15(5.5,-5.5) R16(6.5,-5.5) R17(7.5,-5.5) R18(8.5,-5.5) T1(-8.5,-6.5) T2(-7.5,-6.5) T3(-6.5,-6.5) T4(-5.5,-6.5) T5(-4.5,-6.5) T6(-3.5,-6.5) T7(-2.5,-6.5) T8(-1.5,-6.5) T9(-0.5,-6.5) T10(0.5,-6.5) T11(1.5,-6.5) T12(2.5,-6.5) T13(3.5,-6.5) T14(4.5,-6.5) T15(5.5,-6.5) T16(6.5,-6.5) T17(7.5,-6.5) T18(8.5,-6.5) U1(-8.5,-7.5) U2(-7.5,-7.5) U3(-6.5,-7.5) U4(-5.5,-7.5) U5(-4.5,-7.5) U6(-3.5,-7.5) U7(-2.5,-7.5) U8(-1.5,-7.5) U9(-0.5,-7.5) U10(0.5,-7.5) U11(1.5,-7.5) U12(2.5,-7.5) U13(3.5,-7.5) U14(4.5,-7.5) U15(5.5,-7.5) U16(6.5,-7.5) U17(7.5,-7.5) U18(8.5,-7.5) V1(-8.5,-8.5) V2(-7.5,-8.5) V3(-6.5,-8.5) V4(-5.5,-8.5) V5(-4.5,-8.5) V6(-3.5,-8.5) V7(-2.5,-8.5) V8(-1.5,-8.5) V9(-0.5,-8.5) V10(0.5,-8.5) V11(1.5,-8.5) V12(2.5,-8.5) V13(3.5,-8.5) V14(4.5,-8.5) V15(5.5,-8.5) V16(6.5,-8.5) V17(7.5,-8.5) V18(8.5,-8.5)
  silkscreen extent -9.5,-9.5 9.5,9.5
BGA27X27-B256 [mm]
  round 0.6 smd: A1(-12.065,12.065) A2(-10.795,12.065) A3(-9.525,12.065) A4(-8.255,12.065) A5(-6.985,12.065) A6(-5.715,12.065) A7(-4.445,12.065) A8(-3.175,12.065) A9(-1.905,12.065) A10(-0.635,12.065) A11(0.635,12.065) A12(1.905,12.065) A13(3.175,12.065) A14(4.445,12.065) A15(5.715,12.065) A16(6.985,12.065) A17(8.255,12.065) A18(9.525,12.065) A19(10.795,12.065) A20(12.065,12.065) B1(-12.065,10.795) B2(-10.795,10.795) B3(-9.525,10.795) B4(-8.255,10.795) B5(-6.985,10.795) B6(-5.715,10.795) B7(-4.445,10.795) B8(-3.175,10.795) B9(-1.905,10.795) B10(-0.635,10.795) B11(0.635,10.795) B12(1.905,10.795) B13(3.175,10.795) B14(4.445,10.795) B15(5.715,10.795) B16(6.985,10.795) B17(8.255,10.795) B18(9.525,10.795) B19(10.795,10.795) B20(12.065,10.795) C1(-12.065,9.525) C2(-10.795,9.525) C3(-9.525,9.525) C4(-8.255,9.525) C5(-6.985,9.525) C6(-5.715,9.525) C7(-4.445,9.525) C8(-3.175,9.525) C9(-1.905,9.525) C10(-0.635,9.525) C11(0.635,9.525) C12(1.905,9.525) C13(3.175,9.525) C14(4.445,9.525) C15(5.715,9.525) C16(6.985,9.525) C17(8.255,9.525) C18(9.525,9.525) C19(10.795,9.525) C20(12.065,9.525) D1(-12.065,8.255) D2(-10.795,8.255) D3(-9.525,8.255) D4(-8.255,8.255) D5(-6.985,8.255) D6(-5.715,8.255) D7(-4.445,8.255) D8(-3.175,8.255) D9(-1.905,8.255) D10(-0.635,8.255) D11(0.635,8.255) D12(1.905,8.255) D13(3.175,8.255) D14(4.445,8.255) D15(5.715,8.255) D16(6.985,8.255) D17(8.255,8.255) D18(9.525,8.255) D19(10.795,8.255) D20(12.065,8.255) E1(-12.065,6.985) E2(-10.795,6.985) E3(-9.525,6.985) E4(-8.255,6.985) E17(8.255,6.985) E18(9.525,6.985) E19(10.795,6.985) E20(12.065,6.985) F1(-12.065,5.715) F2(-10.795,5.715) F3(-9.525,5.715) F4(-8.255,5.715) F17(8.255,5.715) F18(9.525,5.715) F19(10.795,5.715) F20(12.065,5.715) G1(-12.065,4.445) G2(-10.795,4.445) G3(-9.525,4.445) G4(-8.255,4.445) G17(8.255,4.445) G18(9.525,4.445) G19(10.795,4.445) G20(12.065,4.445) H1(-12.065,3.175) H2(-10.795,3.175) H3(-9.525,3.175) H4(-8.255,3.175) H17(8.255,3.175) H18(9.525,3.175) H19(10.795,3.175) H20(12.065,3.175) J1(-12.065,1.905) J2(-10.795,1.905) J3(-9.525,1.905) J4(-8.255,1.905) J17(8.255,1.905) J18(9.525,1.905) J19(10.795,1.905) J20(12.065,1.905) K1(-12.065,0.635) K2(-10.795,0.635) K3(-9.525,0.635) K4(-8.255,0.635) K17(8.255,0.635) K18(9.525,0.635) K19(10.795,0.635) K20(12.065,0.635) L1(-12.065,-0.635) L2(-10.795,-0.635) L3(-9.525,-0.635) L4(-8.255,-0.635) L17(8.255,-0.635) L18(9.525,-0.635) L19(10.795,-0.635) L20(12.065,-0.635) M1(-12.065,-1.905) M2(-10.795,-1.905) M3(-9.525,-1.905) M4(-8.255,-1.905) M17(8.255,-1.905) M18(9.525,-1.905) M19(10.795,-1.905) M20(12.065,-1.905) N1(-12.065,-3.175) N2(-10.795,-3.175) N3(-9.525,-3.175) N4(-8.255,-3.175) N17(8.255,-3.175) N18(9.525,-3.175) N19(10.795,-3.175) N20(12.065,-3.175) P1(-12.065,-4.445) P2(-10.795,-4.445) P3(-9.525,-4.445) P4(-8.255,-4.445) P17(8.255,-4.445) P18(9.525,-4.445) P19(10.795,-4.445) P20(12.065,-4.445) R1(-12.065,-5.715) R2(-10.795,-5.715) R3(-9.525,-5.715) R4(-8.255,-5.715) R17(8.255,-5.715) R18(9.525,-5.715) R19(10.795,-5.715) R20(12.065,-5.715) T1(-12.065,-6.985) T2(-10.795,-6.985) T3(-9.525,-6.985) T4(-8.255,-6.985) T17(8.255,-6.985) T18(9.525,-6.985) T19(10.795,-6.985) T20(12.065,-6.985) U1(-12.065,-8.255) U2(-10.795,-8.255) U3(-9.525,-8.255) U4(-8.255,-8.255) U5(-6.985,-8.255) U6(-5.715,-8.255) U7(-4.445,-8.255) U8(-3.175,-8.255) U9(-1.905,-8.255) U10(-0.635,-8.255) U11(0.635,-8.255) U12(1.905,-8.255) U13(3.175,-8.255) U14(4.445,-8.255) U15(5.715,-8.255) U16(6.985,-8.255) U17(8.255,-8.255) U18(9.525,-8.255) U19(10.795,-8.255) U20(12.065,-8.255) V1(-12.065,-9.525) V2(-10.795,-9.525) V3(-9.525,-9.525) V4(-8.255,-9.525) V5(-6.985,-9.525) V6(-5.716,-9.544) V7(-4.445,-9.525) V8(-3.175,-9.525) V9(-1.905,-9.525) V10(-0.635,-9.525) V11(0.635,-9.525) V12(1.905,-9.525) V13(3.175,-9.525) V14(4.445,-9.525) V15(5.715,-9.525) V16(6.985,-9.525) V17(8.255,-9.525) V18(9.525,-9.525) V19(10.795,-9.525) V20(12.065,-9.525) W1(-12.065,-10.795) W2(-10.795,-10.795) W3(-9.525,-10.795) W4(-8.255,-10.795) W5(-6.985,-10.795) W6(-5.715,-10.795) W7(-4.445,-10.795) W8(-3.175,-10.795) W9(-1.905,-10.795) W10(-0.635,-10.795) W11(0.635,-10.795) W12(1.905,-10.795) W13(3.175,-10.795) W14(4.445,-10.795) W15(5.715,-10.795) W16(6.985,-10.795) W17(8.255,-10.795) W18(9.525,-10.795) W19(10.795,-10.795) W20(12.065,-10.795) Y1(-12.065,-12.065) Y2(-10.795,-12.065) Y3(-9.525,-12.065) Y4(-8.255,-12.065) Y5(-6.985,-12.065) Y6(-5.715,-12.065) Y7(-4.445,-12.065) Y8(-3.175,-12.065) Y9(-1.905,-12.065) Y10(-0.635,-12.065) Y11(0.635,-12.065) Y12(1.905,-12.065) Y13(3.175,-12.065) Y14(4.445,-12.065) Y15(5.715,-12.065) Y16(6.985,-12.065) Y17(8.255,-12.065) Y18(9.525,-12.065) Y19(10.795,-12.065) Y20(12.065,-12.065)
  silkscreen extent -13.49,-13.51 13.51,13.49
BNC-EDGE [mil] "Edge-mount BNC Jack"
  rect 50x200 smd: 1(0,25)
  rect 50x250 smd: 2(-195,0) 2(195,0)
  rect 50x250 smd far side: 2(-195,0) 2(195,0)
  silkscreen extent -250,-125 250,876
DBV [mil]
  rect 50x20 smd: 1(0,0) 2(0,-37) 3(0,-75) 4(100,-75) 5(100,0)
  silkscreen extent 105,-45 105,-30
DDPACK3 [mil]
  rect 50x100 smd: 1(-100,0) 2(0,0) 3(100,0)
  rect 400x410 smd: 4(0,325)
  silkscreen extent -220,-70 220,550
DIP14OSC [mil]
  rect 55x55 hole 32: 1(0,0)
  round 55 hole 32: 7(0,-600) 8(300,-600) 14(300,0)
  silkscreen extent -100,-700 400,100
FIDUCIAL#1 [mil] "Fiducial mark"
  round 39.37 smd paste-118.11 mask+39.37: Fiducial(-270,-20)
FIDUCIAL#2 [mil] "Fiducial mark"
  round 39.37 smd paste-118.11 mask+39.37: Fiducial(-390,10)
FIDUCIAL#3 [mil] "Fiducial mark"
  round 39.37 smd paste-118.11 mask+39.37: Fiducial(100,-720)
FIDUCIAL#4 [mil] "Fiducial mark"
  round 39.37 smd paste-118.11 mask+39.37: Fiducial(0,0)
HC-49 [mil]
  round 65 hole 40: 1(0,0) 2(192.13,0)
  silkscreen extent -128,-91 320,91
OSC14X9 [mil]
  rect 178x50 smd: 1(30,0)
  oval 178x50 smd: 2(30,-100) 3(30,-200) 4(316,-200) 5(316,-100) 6(316,0)
  silkscreen extent -40,-375 345,175
POT6MM [mil]
  rect 55x55 hole 32: 1(0,0)
  round 55 hole 32: 2(98.43,-98.43) 3(0,-196.85)
  silkscreen extent -138,-236 138,39
QFP7X7-G32/N [mm]
  rect 1.55x0.5 smd: 1(-4.025,2.8) 2(-4.025,2) 3(-4.025,1.2) 4(-4.025,0.4) 5(-4.025,-0.4) 6(-4.025,-1.2) 7(-4.025,-2) 8(-4.025,-2.8) 17(4.025,-2.8) 18(4.025,-2) 19(4.025,-1.2) 20(4.025,-0.4) 21(4.025,0.4) 22(4.025,1.2) 23(4.025,2) 24(4.025,2.8)
  rect 0.5x1.55 smd: 9(-2.8,-4.025) 10(-2,-4.025) 11(-1.2,-4.025) 12(-0.4,-4.025) 13(0.4,-4.025) 14(1.2,-4.025) 15(2,-4.025) 16(2.8,-4.025) 25(2.8,4.025) 26(2,4.025) 27(1.2,4.025) 28(0.4,4.025) 29(-0.4,4.025) 30(-1.2,4.025) 31(-2,4.025) 32(-2.8,4.025)
  rect 5x5 smd paste-5: 33(0,0)
  silkscreen extent -4.13,-2.85 2.85,3.72
R-QFP14X20-G100/P.65N [mm]
  rect 1.7x0.4 smd: 1(-8.305,9.425) 2(-8.305,8.775) 3(-8.305,8.125) 4(-8.305,7.475) 5(-8.305,6.825) 6(-8.305,6.175) 7(-8.305,5.525) 8(-8.305,4.875) 9(-8.305,4.225) 10(-8.305,3.575) 11(-8.305,2.925) 12(-8.305,2.275) 13(-8.305,1.625) 14(-8.305,0.975) 15(-8.305,0.325) 16(-8.305,-0.325) 17(-8.305,-0.975) 18(-8.305,-1.625) 19(-8.305,-2.275) 20(-8.305,-2.925) 21(-8.305,-3.575) 22(-8.305,-4.225) 23(-8.305,-4.875) 24(-8.305,-5.525) 25(-8.305,-6.175) 26(-8.305,-6.825) 27(-8.305,-7.475) 28(-8.305,-8.125) 29(-8.305,-8.775) 30(-8.305,-9.425) 51(8.305,-9.425) 52(8.305,-8.775) 53(8.305,-8.125) 54(8.305,-7.475) 55(8.305,-6.825) 56(8.305,-6.175) 57(8.305,-5.525) 58(8.305,-4.875) 59(8.305,-4.225) 60(8.305,-3.575) 61(8.305,-2.925) 62(8.305,-2.275) 63(8.305,-1.625) 64(8.305,-0.975) 65(8.305,-0.325) 66(8.305,0.325) 67(8.305,0.975) 68(8.305,1.625) 69(8.305,2.275) 70(8.305,2.925) 71(8.305,3.575) 72(8.305,4.225) 73(8.305,4.875) 74(8.305,5.525) 75(8.305,6.175) 76(8.305,6.825) 77(8.305,7.475) 78(8.305,8.125) 79(8.305,8.775) 80(8.305,9.425)
  rect 0.4x1.7 smd: 31(-6.175,-11.305) 32(-5.525,-11.305) 33(-4.875,-11.305) 34(-4.225,-11.305) 35(-3.575,-11.305) 36(-2.925,-11.305) 37(-2.275,-11.305) 38(-1.625,-11.305) 39(-0.975,-11.305) 40(-0.325,-11.305) 41(0.325,-11.305) 42(0.975,-11.305) 43(1.625,-11.305) 44(2.275,-11.305) 45(2.925,-11.305) 46(3.575,-11.305) 47(4.225,-11.305) 48(4.875,-11.305) 49(5.525,-11.305) 50(6.175,-11.305) 81(6.175,11.305) 82(5.525,11.305) 83(4.875,11.305) 84(4.225,11.305) 85(3.575,11.305) 86(2.925,11.305) 87(2.275,11.305) 88(1.625,11.305) 89(0.975,11.305) 90(0.325,11.305) 91(-0.325,11.305) 92(-0.975,11.305) 93(-1.625,11.305) 94(-2.275,11.305) 95(-2.925,11.305) 96(-3.575,11.305) 97(-4.225,11.305) 98(-4.875,11.305) 99(-5.525,11.305) 100(-6.175,11.305)
  silkscreen extent -8.43,-10.05 7.05,10.3
RAPC712 [mil]
  round 220 hole 140: 1(0,0)
  round 190 hole 120: 2(0,-246) 3(189,-118)
  silkscreen extent -175,-541 175,29
SIP-G3/Y2.1 [mil]
  rect 42x85 smd: 1(-100,0) 2(0,0) 3(100,0)
  rect 425x410 smd: 4(0,325)
  silkscreen extent -235,-65 235,550
SMA-TH-RA [mil]
  round 100 hole 60: 1(0,0)
  round 110 hole 67: 2(-100,-100) 2(-100,100) 2(100,-100) 2(100,100)
  silkscreen extent -160,-160 460,160
SO-8 [mil]
  oval 80x24 smd: 1(0,0) 2(0,-50) 3(0,-100) 4(0,-150) 5(220,-150) 6(220,-100) 7(220,-50) 8(220,0)
  silkscreen extent 60,-175 160,25
SO-14 [mil]
  oval 80x24 smd: 1(-0.32,0.14) 2(-0.32,-49.86) 3(-0.32,-99.86) 4(-0.32,-149.86) 5(-0.32,-199.86) 6(-0.32,-249.86) 7(-0.32,-299.86) 8(219.68,-299.86) 9(219.68,-249.86) 10(219.68,-199.86) 11(219.68,-149.86) 12(219.68,-99.86) 13(219.68,-49.86) 14(219.68,0.14)
  silkscreen extent 60,-325 160,25
SO-16 [mil]
  oval 80x24 smd: 1(0,0) 2(0,-50) 3(0,-100) 4(0,-150) 5(0,-200) 6(0,-250) 7(0,-300) 8(0,-350) 9(220,-350) 10(220,-300) 11(220,-250) 12(220,-200) 13(220,-150) 14(220,-100) 15(220,-50) 16(220,0)
  silkscreen extent 60,-375 160,25
SOT-23 [mil]
  rect 36x36 smd: 1(0,0) 2(75,0)
  rect 36x50 smd: 3(38,80)
  silkscreen extent -20,-5 95,85
SSO-G20/P.65 [mm]
  rect 0.4x2.15 smd: 1(-2.925,-3.275) 2(-2.275,-3.275) 3(-1.625,-3.275) 4(-0.975,-3.275) 5(-0.325,-3.275) 6(0.325,-3.275) 7(0.975,-3.275) 8(1.625,-3.275) 9(2.275,-3.275) 10(2.925,-3.275) 11(2.925,3.275) 12(2.275,3.275) 13(1.625,3.275) 14(0.975,3.275) 15(0.325,3.275) 16(-0.325,3.275) 17(-0.975,3.275) 18(-1.625,3.275) 19(-2.275,3.275) 20(-2.925,3.275)
  silkscreen extent -3.8,-3.4 3.75,1.8
SSO-G48 [mm]
  rect 0.4x2.2 smd: 1(-7.302,-4.7) 2(-6.667,-4.7) 3(-6.032,-4.7) 4(-5.397,-4.7) 5(-4.763,-4.7) 6(-4.127,-4.7) 7(-3.492,-4.7) 8(-2.857,-4.7) 9(-2.222,-4.7) 10(-1.587,-4.7) 11(-0.952,-4.7) 12(-0.317,-4.7) 13(0.318,-4.7) 14(0.953,-4.7) 15(1.588,-4.7) 16(2.223,-4.7) 17(2.858,-4.7) 18(3.492,-4.7) 19(4.127,-4.7) 20(4.763,-4.7) 21(5.397,-4.7) 22(6.032,-4.7) 23(6.667,-4.7) 24(7.302,-4.7) 25(7.302,4.7) 26(6.667,4.7) 27(6.032,4.7) 28(5.397,4.7) 29(4.763,4.7) 30(4.127,4.7) 31(3.492,4.7) 32(2.857,4.7) 33(2.222,4.7) 34(1.587,4.7) 35(0.952,4.7) 36(0.317,4.7) 37(-0.318,4.7) 38(-0.953,4.7) 39(-1.588,4.7) 40(-2.223,4.7) 41(-2.858,4.7) 42(-3.492,4.7) 43(-4.127,4.7) 44(-4.763,4.7) 45(-5.397,4.7) 46(-6.032,4.7) 47(-6.667,4.7) 48(-7.302,4.7)
  silkscreen extent -8.18,-4.83 8,3.2
USB-B [mil]
  round 60 hole 36: 1(98.43,0) 2(0,0) 3(0,-78.74) 4(98.43,-78.74)
  round 150 hole 91: 5(-187.8,-185.43) 6(283.47,-185.43)
  silkscreen extent -187,-591 283,39

## Part data
C1 C2 C3 C4 C5 C6 C7 C8 C9 C10 C11 C12 C13 C14 C15 C16 C17 C18 C19 C20 C21 C22 C23 C24 C25 C26 C27 C28 C29 C30 C31 C32 C33 C34 C35 C36 C37 C38 C39 C40 C41 C42 C43 C44 C45 C46 C47 C48 C49 C50 C51 C52 C53 C54 C55 C56 C57 C58 C59 C60 C61 C62 C67 C68 C69 C70 C71 C72 C73 C74 C75 C76 C77 C78 C79 C80 C81 C82 C83 C84 C85 C86 C87 C88 C89 C90 C91 C92 C93 C94 C95 C96 C97 C98 C99 C100 C101 C102 C103 C104 C105 C106 C107 C108 C109 C110 C111 C112 C113 C114 C115 C116 C117 C118 C119 C120 C121 C122 C123 C124 C125 C126 C127 C128 C129 C130 C131 C132 C133 C134 C135 C136 C137 C140 C141 C142 C143 C144 C145 C146 C147 C148 C149 C150 C151 C152 C153 C155 C156 C157 C158 C159 C160 C161 C162 C163 C164 C165 C166 C168 C169 C170 C171 C172 C173 C174 C175 C176 C177 C178 C179 C180 C181 C182 C183 C184 C185 C186 C187 C188 C189 C190 C191 C192 C193 C194 C195 C196 C197 C198 C199 C200 C201 C202 C211 C212 C213 C214 C215 C216 C217 C218 C219 C220 C221 C222 C223 C224 C225 C226 C227 C228 C229 C230 C231 C232 C233 C234 C235 C236 C237 C238 C239 C240 C246 C247 C248 C249 C252 C253 C254 C255 C256 C257 C258 C259 C261 C263 C264 C266 C267 C268 C269 C270 C271 C272 C273 C274 C275 C276 C277 C278 C279 C280 C281 C282 C283 C284 C285: library part CAP, "SMT CAP"
C63 C64 C65 C66 C138 C139 C154 C167 C203 C204 C205 C206 C207 C208 C209 C210 C241 C242 C243 C244 C245 C250 C251 C260 C262 C265: library part "CAPACITOR POL"
D1 D2: "High Conductance Ultra Fast Diode"
D3 D4 D5 D6 D7 D8 D9 D10 D11 D12 D13 D14 D15 D16 D17 D18 D19 D20 D21 D22 D23 D24 D25 D26 D27 D28 D30 D31: "Typical RED, GREEN, YELLOW, AMBER GaAs LED"
D32 D33: library part MMBD914, "High Conductance Ultra Fast Diode"
FID1 FID2 FID3 FID4 FID5 FID6: "Fiducial mark"
J1: "Power Jack"
J2 J3 J4 J5: "BNC"
J6 J7 J8 J9 J10 J11 J12 J13 J14 J15 J16 J17 J18 J19: "BNC Jack"
J20: "Universal Serial Bus Type B Receptacle"
JB1 JB2 JB3 JB4: "3X1PIN"
JB5: "5x1 Pin Friction Lock"
JP10 JP11 JP12 JP13: library part "HEADER 4X4"
L1 L2 L3 L4 L5 L6 L7 L8: library part Inductor, "Inductor"
L9 L10: library part INDUCTOR1
Q1: library part LM2940S-5.0, "3-Terminal Positive Regulator"
Q2: "3-Terminal Positive Regulator"
R1 R2 R3 R4 R5 R6 R7 R8 R9 R10 R11 R12 R13 R14 R15 R16 R17 R18 R19 R20 R21 R22 R23 R24 R25 R26 R27 R28 R29 R30 R31 R32 R33 R34 R35 R36 R37 R38 R39 R40 R41 R42 R43 R44 R45 R46 R47 R48 R49 R50 R51 R52 R53 R54 R55 R56 R57 R58 R59 R60 R61 R62 R63 R64 R65 R66 R67 R68 R69 R70 R71 R72 R73 R74 R75 R76 R77 R78 R79 R80 R81 R82 R83 R84 R85 R86 R87 R88 R89 R90 R91 R92 R93 R94 R95 R96 R97 R98 R99 R100 R101 R102 R103 R104 R105 R106 R107 R108 R109 R110 R111 R112 R113 R114 R115 R116 R117 R118 R119 R120 R121 R122 R123 R124 R125 R126 R127 R128 R129 R130 R131 R132 R133 R134 R135 R136 R137 R138 R139 R140 R141 R142 R143 R144 R145 R146 R147 R148 R149 R150 R151 R152 R153 R154 R155 R156 R157 R158 R159 R160 R161 R162 R163 R164 R166 R167 R168 R169 R170 R171 R172 R173 R174 R175 R176 R177 R178 R179 R180 R181 R182 R183 R184 R185 R186 R187 R188 R189 R190 R191 R192 R193 R194 R195 R196 R197 R198 R199 R200 R201 R202 R203 R204 R205 R206 R207 R208 R209 R210 R211 R212 R213 R214 R215 R216 R217 R218 R219 R220 R221 R222 R223 R224 R225 R226 R227 R228 R229 R230 R231 R232 R233 R234 R235: library part RES1
R165: library part POT, "POT"
U6: library part TPS3820, "Processor Supervisory Circuit"
U8: "128-bit I2C Bus Serial EEPROM"
U9: library part CY2DP314
U16 U17 U18 U19: "HD-LINX II Multi-Rate SDI Dual Slew-Rate Cable Driver"
U20 U21 U22 U23: "HD-LINX II Multi-Rate SDI Adaptive Cable Equalizer"
X1: library part "PECL OSCILLATOR", "PECL OSCILLATOR MODULE"
X2 X3 X4 X5: library part "PECL SMT OSC"
Y1: library part CRYSTAL, "Crystal"

## Free pads (board coordinates)
  round 60 hole 156 unplated: Tooling(200,200) Tooling(200,5800) Tooling(7800,200) Tooling(7800,5800)
  round 24 hole 12: TVIA(3540,4120) TVIA(3540,4170) TVIA(3540,4220) TVIA(3540,4270) TVIA(3540,4320) TVIA(3600,4050) TVIA(3600,4100) TVIA(3600,4150) TVIA(3600,4200) TVIA(3600,4250) TVIA(3600,4300) TVIA(3600,4350) TVIA(3660,1420) TVIA(3660,1470) TVIA(3660,1520) TVIA(3660,1570) TVIA(3660,1620) TVIA(3660,1670) TVIA(3660,1720) TVIA(3660,1870) TVIA(3665,4320) TVIA(3665,4370) TVIA(3665,4420) TVIA(3665,4470) TVIA(3665,4570) TVIA(3665,4620) TVIA(3665,4670) TVIA(3665,4720) TVIA(3720,1400) TVIA(3720,1450) TVIA(3720,1500) TVIA(3720,1550) TVIA(3720,1600) TVIA(3720,1650) TVIA(3720,1700) TVIA(3720,1750) TVIA(3725,4300) TVIA(3725,4350) TVIA(3725,4400) TVIA(3725,4450) TVIA(3725,4550) TVIA(3725,4600) TVIA(3725,4650) TVIA(3725,4700) TVIA(3780,1420) TVIA(3780,1470) TVIA(3780,1520) TVIA(3780,1570) TVIA(3780,1620) TVIA(3780,1720) TVIA(3780,1770) TVIA(3780,1820) TVIA(3785,4070) TVIA(3785,4120) TVIA(3785,4170) TVIA(3785,4220) TVIA(3785,4270) TVIA(3785,4320) TVIA(3785,4370) TVIA(3785,4420) TVIA(3800,4750) TVIA(3840,1450) TVIA(3840,1500) TVIA(3840,1550) TVIA(3840,1600) TVIA(3840,1650) TVIA(3840,1750) TVIA(3840,1800) TVIA(3840,1850) TVIA(3845,4050) TVIA(3845,4100) TVIA(3845,4150) TVIA(3845,4200) TVIA(3845,4250) TVIA(3845,4300) TVIA(3845,4350) TVIA(3845,4400) TVIA(3845,4450) TVIA(3900,1220) TVIA(3900,1270) TVIA(3900,1320) TVIA(3900,1370) TVIA(3900,1420) TVIA(3900,1520) TVIA(3905,4420) TVIA(3905,4470) TVIA(3905,4520) TVIA(3905,4570) TVIA(3905,4620) TVIA(3905,4670) TVIA(3960,1250) TVIA(3960,1300) TVIA(3960,1350) TVIA(3960,1400) TVIA(3960,1500) TVIA(3965,4400) TVIA(3965,4450) TVIA(3965,4500) TVIA(3965,4550) TVIA(3965,4600) TVIA(4020,1570) TVIA(4020,1620) TVIA(4020,1670) TVIA(4020,1720) TVIA(4020,1770) TVIA(4020,1820) TVIA(4080,1550) TVIA(4080,1600) TVIA(4080,1650) TVIA(4080,1700) TVIA(4080,1800) TVIA(4080,1850)

## Via types
v1: diameter 24, hole 12, TopLayer (1 oz) to BottomLayer (1 oz), 1958 vias